# Altium PCB frontbreakoutPCB.PcbDoc (part 2 of 2)
Units mil, origin at the board's own origin, x right, y up, seen from the top; angles counter-clockwise.
Board outline 4390 x 2730 mil, 2 copper layers (Top Layer, Bottom Layer); 90 components, 124 nets, 373 pads, 85 vias.
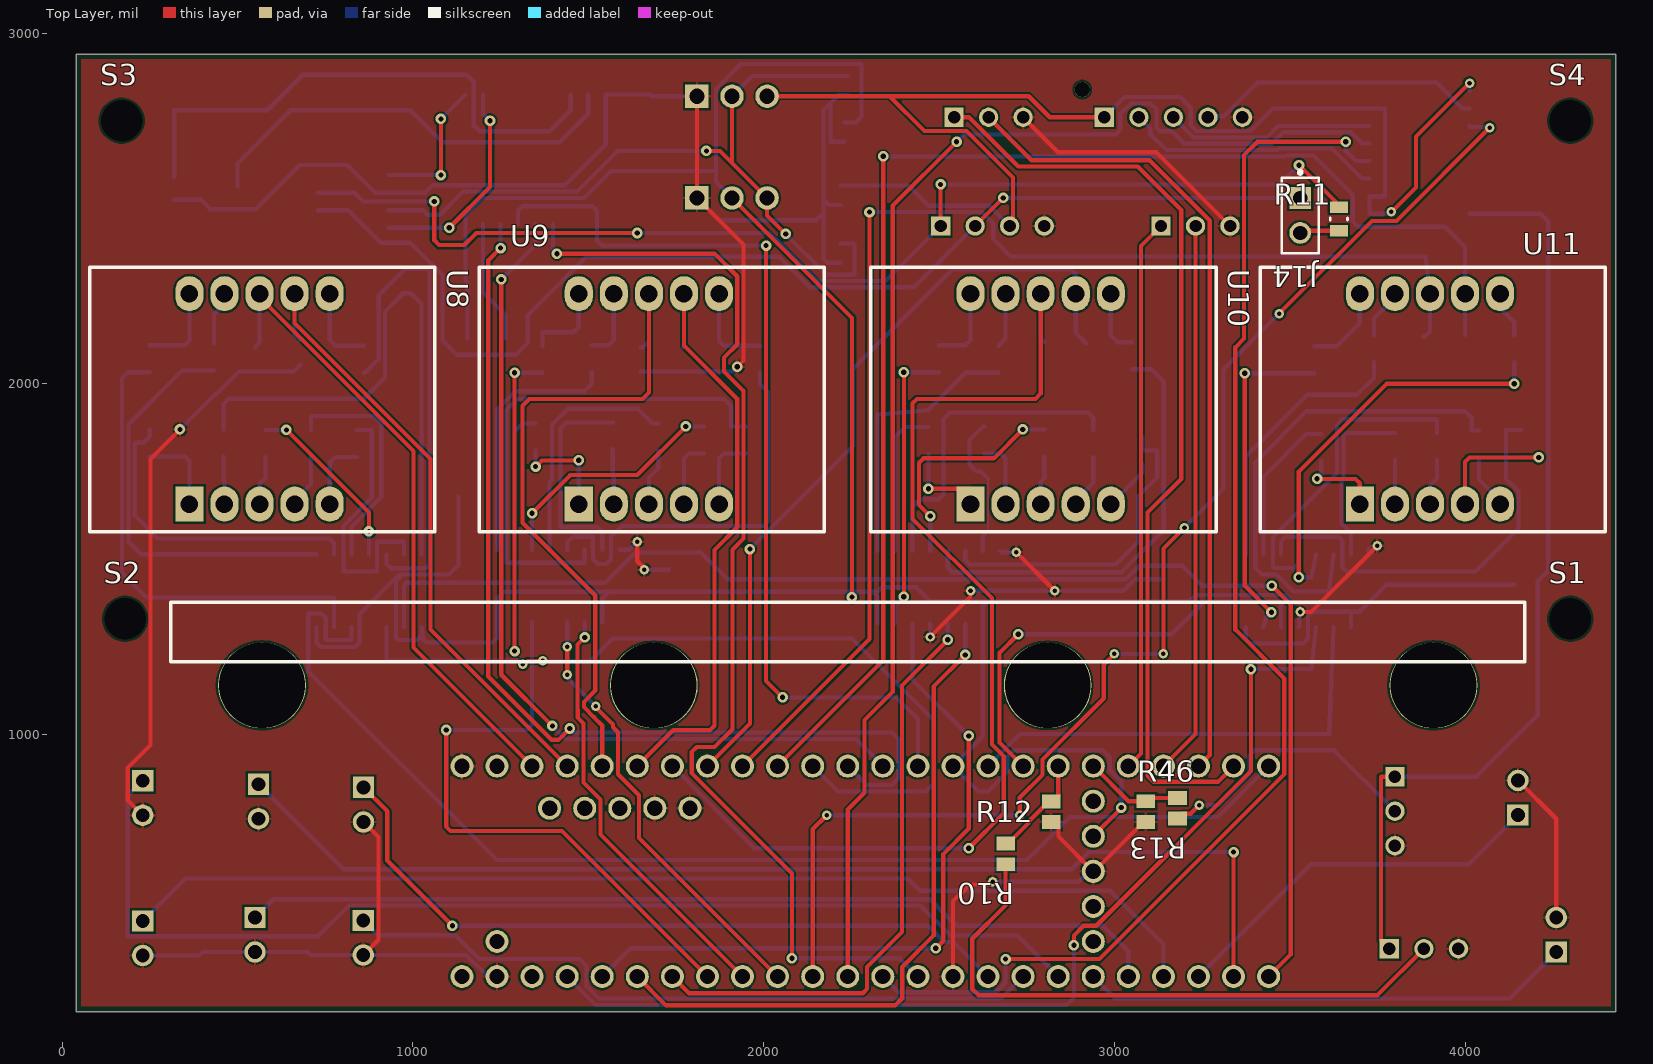
[diagram p0: Top Layer view]

## Via types
v1: diameter 30, hole 15, Top Layer to Bottom Layer, 61 vias
v2: diameter 27, hole 13, Top Layer to Bottom Layer, 24 vias

## Nets (pads, with @x,y where several pads share a name; then routed paths per layer and width w, separated by ;. In a path a pad name is that pad's centre, name@x,y a point inside that pad or via, vN(x,y) a via of type N, cw(c..) or ccw(c..) an arc to the next point about the centre after c; other vN are vias at no path point) (continued)
pads on no net: "Hall Effects." B1.43 B1.46 B1.47 B1.50 B1.51 B1.52 B1.53 B1.55 B1.57 B1.68 S1.x S2.x S3.x S4.x U2.9 U3.5 U3.8 U4.3 U4.4 U4.5 U4.6 U4.10 U4.11 U5.9 U6.9 U7.9 U13.12 U13.13 U13.14

## Polygon pours and split planes (outlines as drawn)
GND on Bottom Layer "GND_L02_P000" (solid, pour order 0): 0,100 4540,100 4550,110 4510,150 4510,3020 20,3020 0,3040
GND on Top Layer "GND_L01_P001" (solid, pour order 1): 0,100 4570,100 4570,3070 4560,3080 0,3080 0,20

## Silkscreen, mask and mechanical layers (free items; w line width, h text height)
Top Overlay:
  lines w10: 310,1207 4170,1207 4170,1377 310,1377 310,1207
Bottom Overlay:
  drawing of 23 lines, arcs and shapes, not listed
  text "Elijah Gordon" at 2716.59,643.33 h40
  text "Dashboard" at 2713.28,570 h40
  text "Rev 3.0 4/18/23" at 2736.57,500 h40
Mechanical 1:
  circle w10: c1687,1140 r122
  circle w10: c2810,1140 r122
  lines w10: 160,1328 180,1308 ; 40,210 4430,210 4430,2940 40,2940 40,210